# Altium PCB radxa_cm3_io_board_v1360_pcb_layout.PcbDoc (part 4 of 7)
Units mil, origin at the board's own origin, x right, y up, seen from the top; angles counter-clockwise.
Board outline 6299.61 x 3544.09 mil, 4 copper layers (Top, GND, Power, Bottom), stack 35.4 mil thick; 513 components, 397 nets, 1855 pads, 2695 vias.
Unrouted connection lines stored in the file: 280.
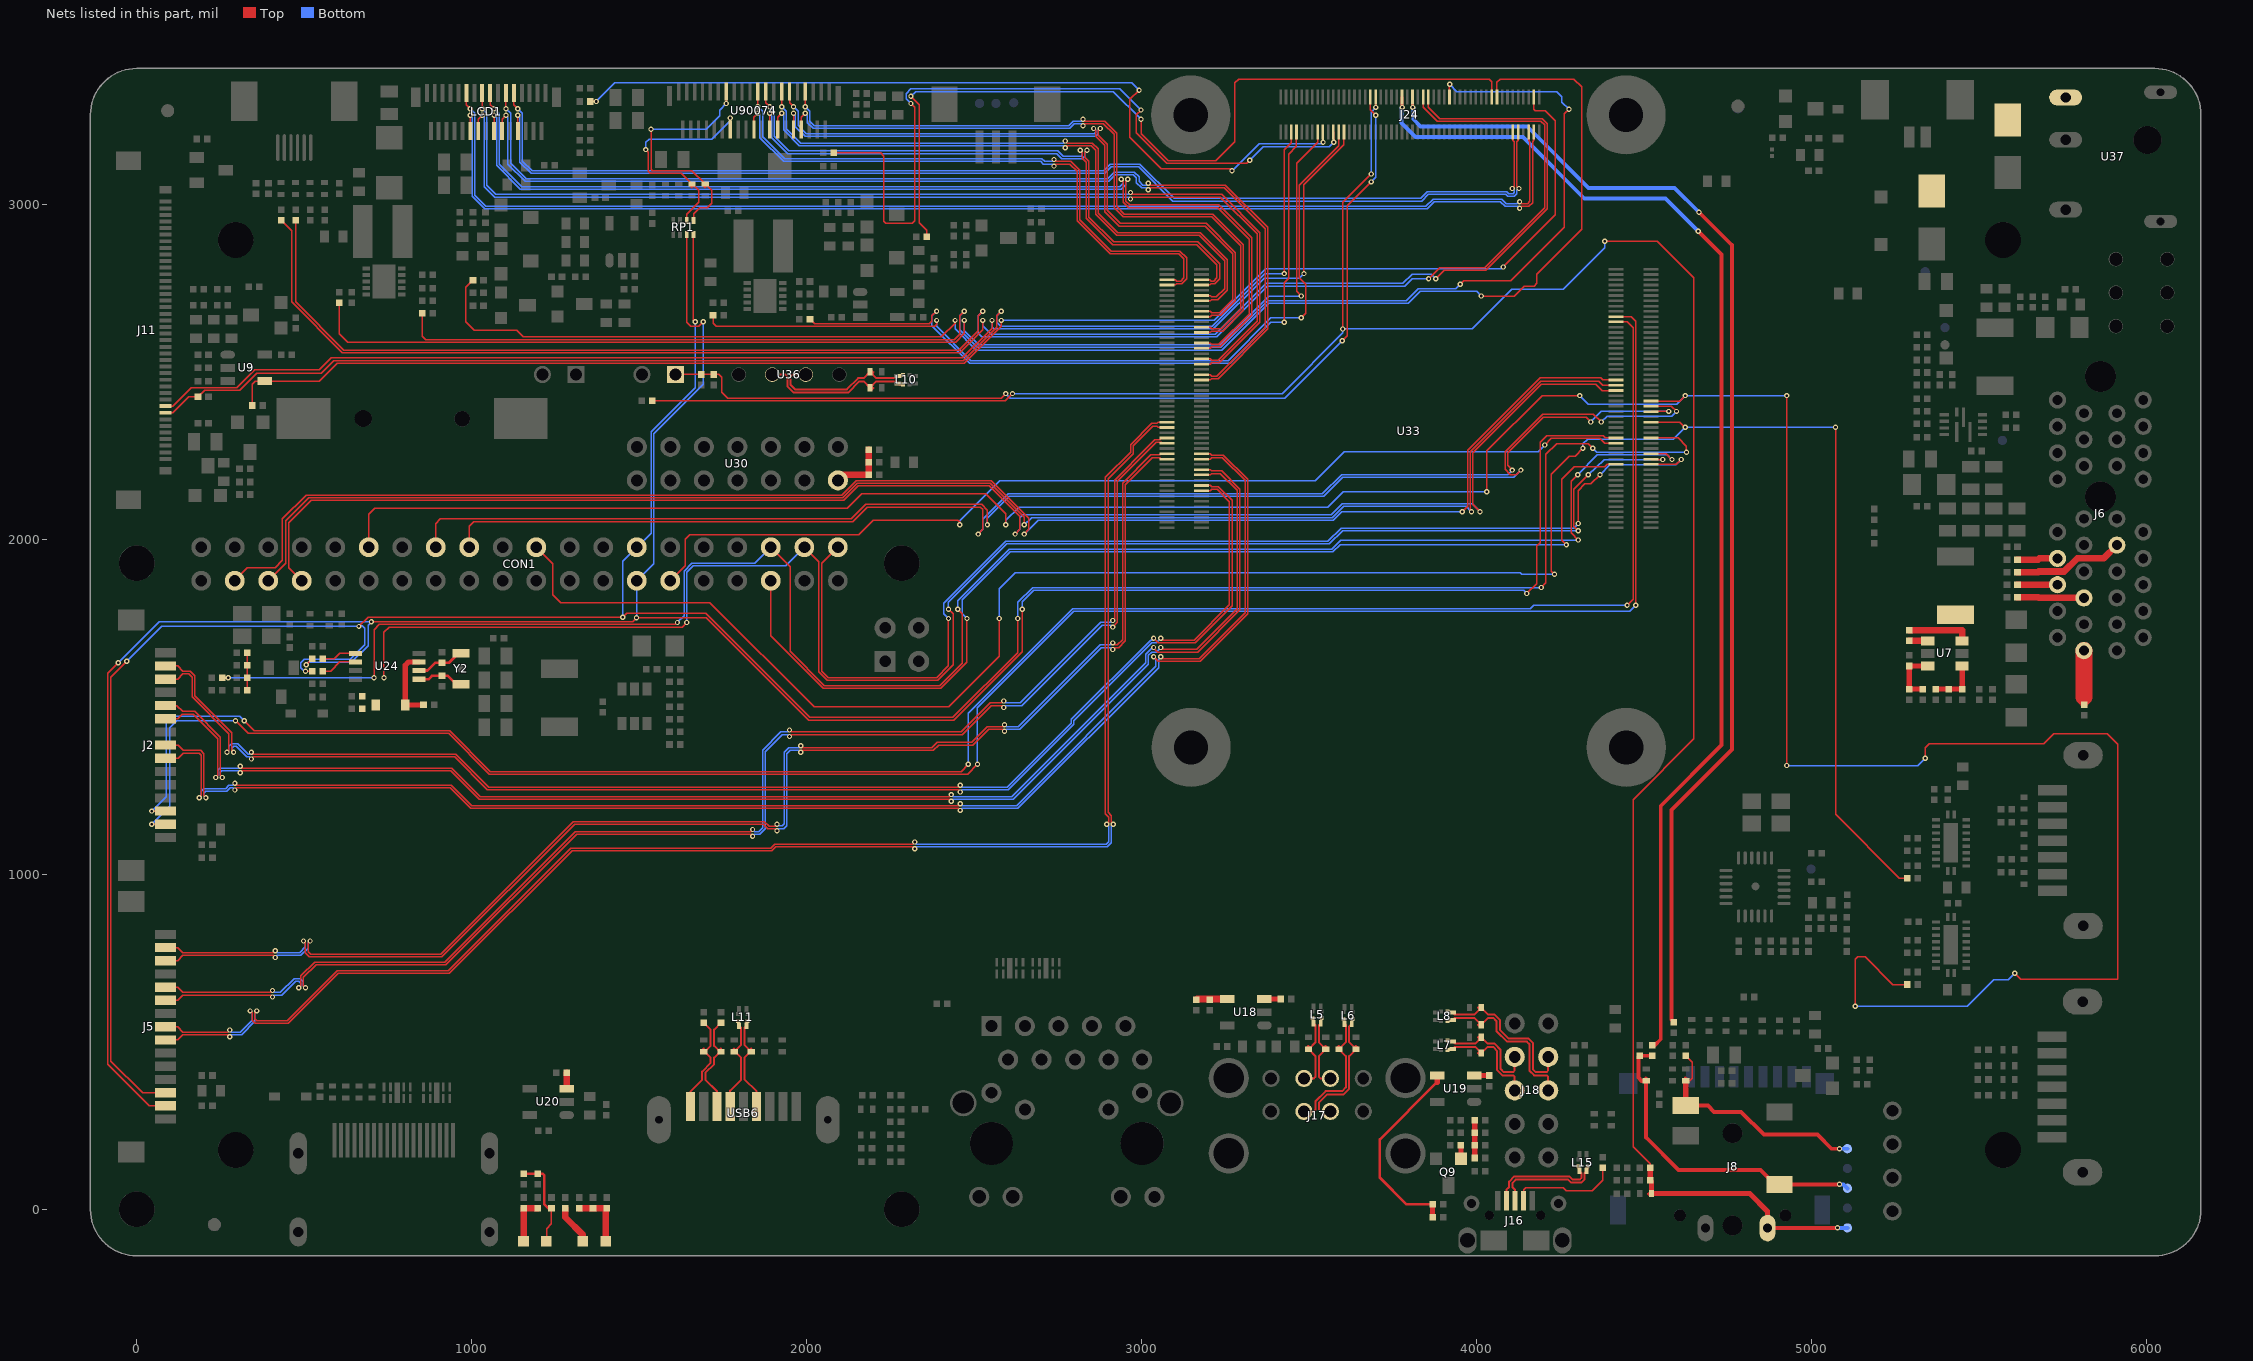
[diagram p6: the nets of this part, all layers, seen from the top]

## Via types
v1: diameter 15.75, hole 7.87, Top to Bottom, 2660 vias
v2: diameter 19.68, hole 11.81, Top to Bottom, 35 vias

## Nets (pads, with @x,y where several pads share a name; then routed paths per layer and width w, separated by ;. In a path a pad name is that pad's centre, name@x,y a point inside that pad or via, vN(x,y) a via of type N, cw(c..) or ccw(c..) an arc to the next point about the centre after c; other vN are vias at no path point) (continued)
HPL_OUT: J24.50 R16.2 | length 3570.7
  Top w7.87: J24.50@3808.46,3320.08 3808.46,3305.12 v1(3809.06,3289.37)
  Top w11.81: R16.2@4588.58,559.06 4580.71,566.93 4580.71,1191.73 4761.81,1372.83 4761.81,2877.95 v1(4663.39,2976.38)
  Bottom w11.81: v1(3809.06,3289.37) 3811.02,3287.4 3811.02,3253.94 3832.68,3232.28 4150.84,3232.28 4333.91,3049.21 4590.55,3049.21 v1(4663.39,2976.38)
HPR_OUT: J24.54 R19.2 | length 3646.2
  Top w7.87: J24.54@3776.97,3320.08 3776.97,3297.24 v1(3777.56,3289.37)
  Top w11.81: R19.2@4523.62,490.16 4531.5,490.16 4549.21,507.87 4549.21,1204.77 4730.31,1385.87 4730.31,2850.39 v1(4661.42,2919.29)
  Bottom w11.81: v1(3777.56,3289.37) 3775.59,3287.4 3775.59,3242.13 3816.93,3200.79 4137.8,3200.79 4320.87,3017.72 4562.99,3017.72 v1(4661.42,2919.29)
I2C0_SCL_PMIC: J2.3 U33.80 | length 5948.8
  Top w3.94: v1(45.28,1188.98) J2.3@86.58,1188.98 ; v1(320.87,1458.66) 350.39,1429.13 934.17,1429.13 1056.21,1307.09 2460.63,1307.09 v1(2482.28,1328.74) ; U33.80@4415.75,2649.02 4449.41,2649.02 4466.54,2631.89 4466.54,1820.87 v1(4448.82,1803.15)
  Bottom w3.94: v1(45.28,1188.98) 88.58,1232.28 88.58,1452.76 108.27,1472.44 307.09,1472.44 v1(320.87,1458.66) ; v1(2482.28,1328.74) 2482.28,1481.41 2794.18,1793.31 4160.33,1793.31 4170.18,1803.15 v1(4448.82,1803.15)
I2C0_SDA_PMIC: J2.2 U33.82 | length 6021.8
  Top w3.94: v1(45.28,1149.61) v1(45.28,1149.61) J2.2@86.61,1149.65 ; v1(295.28,1458.66) 332.68,1421.26 930.9,1421.26 1052.95,1299.21 2480.31,1299.21 v1(2509.84,1328.74) ; U33.82@4415.75,2664.76 4460.63,2664.76 4474.41,2650.98 v1(4474.41,1803.15)
  Bottom w3.94: v1(45.28,1149.61) 98.43,1202.76 98.43,1437.01 120.08,1458.66 v1(295.28,1458.66) ; v1(2509.84,1328.74) 2509.84,1497.83 2797.44,1785.43 4456.69,1785.43 v1(4474.41,1803.15)
I2C2_SCL_LCD: D14.1 RP1.4 U90074.27 | length 754.3
  Top w3.94: v1(1535.43,3224.41) 1535.43,3104.33 1539.37,3100.39 1657.48,3100.39 D14.1@1696.85,3061.02 1716.54,3041.34 1716.54,3003.94 1702.76,2990.16 1681.1,2990.16 1663.39,2972.44 1663.39,2953.1 RP1.4@1661.89,2951.6 ; v1(1759.84,3301.18) U90074.27@1759.84,3336.61
  Bottom w3.94: v1(1535.43,3224.41) 1700.79,3224.41 1740.16,3263.78 1740.16,3281.5 v1(1759.84,3301.18)
I2C2_SCL_M1: CON1.28 J5.3 R140.1 RP1.5 U33.35 | length 8631
  Top w3.94: v1(-29.53,1635.83) -76.77,1588.58 -76.77,442.91 17.75,348.4 J5.3@86.61,348.4 ; v1(503.94,1606.3) R140.1@523.62,1606.3 ; v1(663.39,1740.16) 690.94,1767.72 v1(1450.79,1767.72) 1462.6,1779.53 1698.14,1779.53 2009.17,1468.5 2436.39,1468.5 2629.92,1662.03 v1(2629.92,1763.78) ; RP1.5@1661.89,2910.6 1661.89,2653.54 1667.32,2648.11 v1(1667.32,2649.61) ; v1(4192.91,1856.3) 4206.69,1870.08 4206.69,2253.94 4238.19,2285.43 4332.68,2285.43 v1(4346.46,2271.65) ; U33.35@4520.47,2302.56 4600.98,2302.56 4625.98,2277.56 v1(4625.98,2259.84)
  Bottom w3.94: v1(-29.53,1635.83) 74.8,1740.16 v1@661.42,1740.16 ; v1(503.94,1606.3) 500,1606.3 490.16,1616.14 490.16,1631.89 500,1641.73 637.8,1641.73 681.1,1685.04 681.1,1734.25 673.23,1742.13 663.39,1742.13 v1@661.42,1740.16 ; v1(663.39,1740.16) v1@661.42,1740.16 ; v1(1450.79,1767.72) 1450.79,1934.25 CON1.28@1492.91,1976.38 1535.43,2018.9 1535.43,2320.87 1667.32,2452.76 v1(1667.32,2649.61) ; v1(2629.92,1763.78) 2629.92,1811.7 2674.52,1856.3 v1(4192.91,1856.3) ; v1(4346.46,2271.65) 4358.27,2259.84 v1(4625.98,2259.84)
I2C2_SCL_MO: CON1.5 U33.56 | length 4588.5
  Top w3.94: CON1.5@392.91,1876.38 444.88,1928.35 444.88,2055.12 513.78,2124.02 2107.59,2124.02 2150.9,2167.32 2547.92,2167.32 2649.61,2065.64 v1(2649.61,2043.31) ; v1(3984.25,2082.68) 3980.31,2086.61 3980.31,2261.81 4190.94,2472.44 4363.58,2472.44 4375.98,2460.04 U33.56@4415.75,2460.04
  Bottom w3.94: v1(2649.61,2043.31) 2671.26,2064.96 3568.96,2064.96 3602.42,2098.43 3968.5,2098.43 v1(3984.25,2082.68)
I2C2_SDA_LCD: D17.1 RP1.3 U90074.26 | length 688.7
  Top w3.94: v1(1519.69,3163.39) 1527.56,3155.51 1527.56,3098.43 1533.46,3092.52 1625.98,3092.52 D17.1@1657.48,3061.02 1677.17,3041.34 1677.17,3005.91 1641.89,2970.63 RP1.3@1641.89,2951.6 ; U90074.26@1771.65,3223.43 v1(1771.65,3257.87)
  Bottom w3.94: v1(1519.69,3163.39) 1519.69,3185.04 1529.53,3194.88 1716.54,3194.88 1771.65,3250 v1(1771.65,3257.87)
I2C2_SDA_M1: CON1.27 J5.2 R141.1 RP1.6 U33.36 | length 8380.9
  Top w3.94: v1@-55.12,1631.85 -86.57,1600.39 -86.57,433.03 37.36,309.1 J5.2@86.61,309.1 ; v1(505.91,1625.98) R141.1@523.62,1643.7 ; v1(700.79,1753.94) 1480.31,1753.94 v1(1492.13,1765.75) 1700.79,1765.75 2005.91,1460.63 2439.65,1460.63 2643.7,1664.68 v1(2643.7,1791.34) ; RP1.6@1641.89,2910.6 1641.89,2647.48 1653.54,2635.83 1677.17,2635.83 v1(1690.94,2649.61) ; v1(4149.61,1838.58) 4179.13,1868.11 4179.13,1980.31 4188.98,1990.16 4188.98,2289.37 4208.66,2309.06 4377.36,2309.06 4383.86,2302.56 U33.36@4415.75,2302.56
  Bottom w3.94: v1(-55.12,1631.89) 66.93,1753.94 v1@698.82,1753.94 ; v1(505.91,1625.98) 508.75,1628.83 508.75,1629.92 511.81,1632.98 640.86,1632.98 690.94,1683.07 690.94,1743.62 701.26,1753.94 v1@698.82,1753.94 ; v1(700.79,1753.94) v1@698.82,1753.94 ; v1(1492.13,1765.75) 1492.91,1766.54 CON1.27@1492.91,1876.38 1543.31,1926.77 1543.31,2314.96 1690.94,2462.6 v1(1690.94,2649.61) ; v1(2643.7,1791.34) 2643.7,1814.34 2677.78,1848.43 4139.76,1848.43 v1(4149.61,1838.58)
I2C2_SDA_MO: CON1.3 U33.58 | length 4727.1
  Top w3.94: CON1.3@292.91,1876.38 292.91,1877.56 330.71,1915.35 413.39,1915.35 435.04,1937.01 435.04,2061.02 505.91,2131.89 2104.33,2131.89 2133.86,2161.42 2147.64,2175.2 2551.18,2175.2 2663.39,2062.99 2663.39,2029.53 v1(2649.61,2015.75) ; v1(3956.69,2082.68) 3972.44,2098.43 3972.44,2265.75 4188.98,2482.28 4370.08,2482.28 4376.57,2475.79 U33.58@4415.75,2475.79
  Bottom w3.94: v1(2649.61,2015.75) 2690.94,2057.09 3572.22,2057.09 3597.81,2082.68 v1(3956.69,2082.68)
I2C3_SCL_TP: J24.44 R49.1 | length 4976.4
  Top w3.94: R49.1@431.1,2952.76 462.6,2921.26 462.6,2708.66 614.17,2557.09 2457.43,2557.09 2525.59,2625.25 v1(2525.59,2653.54) ; J24.44@3855.71,3320.08 3855.71,3289.96 3889.76,3255.91 4194.94,3255.91 4210.63,3240.22 4210.63,2990.83 4210.63,2986.9 4026.88,2803.15 3903.54,2803.15 v1(3877.95,2777.56)
  Bottom w3.94: v1(2525.59,2653.54) 2525.59,2637.8 2551.18,2612.2 3220.03,2612.2 3371.6,2763.78 3779.53,2763.78 3807.09,2791.34 3864.17,2791.34 v1(3877.95,2777.56)
I2C3_SDA_TP: J24.46 R48.1 | length 5017.6
  Top w3.94: R48.1@474.41,2952.76 474.41,2708.66 618.11,2564.96 2454.16,2564.96 2511.81,2622.61 2511.81,2667.32 v1(2525.59,2681.1) ; J24.46@3839.96,3320.08 3839.96,3289.96 3881.89,3248.03 4191.68,3248.03 4202.76,3236.95 4202.76,2990.16 4023.62,2811.02 3889.76,2811.02 v1(3856.3,2777.56)
  Bottom w3.94: v1(2525.59,2681.1) 2511.81,2667.32 2511.81,2615.29 2522.77,2604.33 3223.29,2604.33 3374.87,2755.91 3785.43,2755.91 3807.09,2777.56 v1(3856.3,2777.56)
I2S1_LRCK_RX_M1: CON1.36 R80.2 U33.29 | length 5592.8
  Top w3.94: R80.2@255.91,1586.61 v1(273.62,1586.61) ; v1(708.66,1586.61) 708.66,1730.31 724.41,1746.06 1608.27,1746.06 v1(1614.17,1751.97) ; CON1.36@1892.91,1976.38 1950.79,1918.5 1950.79,1665.35 2053.15,1562.99 2397.25,1562.99 2464.57,1630.31 2464.57,1777.56 v1(2450.79,1791.34) ; v1(4301.18,2192.91) 4281.5,2173.23 4281.5,2019.68 v1(4303.15,1998.03) ; U33.29@4520.47,2255.31 4565.55,2255.31 v1(4582.68,2238.19)
  Bottom w3.94: v1(273.62,1586.61) v1(708.66,1586.61) ; v1(1614.17,1751.97) 1633.86,1771.65 1633.86,1905.51 1657.48,1929.13 1845.67,1929.13 CON1.36@1892.91,1976.38 ; v1(2450.79,1791.34) 2450.79,1816.99 2604.27,1970.47 3566.93,1970.47 3594.49,1998.03 v1(4303.15,1998.03) ; v1(4301.18,2192.91) 4360.24,2251.97 4568.9,2251.97 v1(4582.68,2238.19)
I2S1_LRCK_TX_M1: CON1.35 U33.26 | length 3291.6
  Top w3.94: CON1.35@1892.91,1876.38 1892.91,1712.09 2049.89,1555.12 2400.51,1555.12 2478.35,1632.95 v1(2478.35,1763.78) ; v1(4267.72,1984.25) 4253.94,1998.03 4253.94,2179.13 4291.34,2216.54 4382.48,2216.54 4389.76,2223.82 U33.26@4415.75,2223.82
  Bottom w3.94: v1(2478.35,1763.78) 2464.57,1777.56 2464.57,1819.63 2607.53,1962.6 3570.87,1962.6 3592.52,1984.25 v1(4267.72,1984.25)
I2S1_MCLK_M1: CON1.22 R28.2 U33.41 | length 6350.2
  Top w3.94: CON1.22@1192.91,1976.38 1242.13,1927.17 1242.13,1834.65 1265.75,1811.02 1711.19,1811.02 2022.21,1500 2423.34,1500 2574.8,1651.46 v1(2574.8,1763.78) ; v1(4232.28,1895.67) 4222.44,1905.51 4222.44,2194.88 4275.59,2248.03 4293.31,2248.03 v1(4316.93,2271.65) ; U33.41@4520.47,2349.8 4606.3,2349.8 4621.46,2334.65 v1(4622.05,2334.65) ; v1(5070.87,2334.65) 5070.87,1179.13 5261.81,988.19 R28.2@5285.43,988.19
  Bottom w3.94: v1(2574.8,1763.78) 2574.8,1851.92 2622.49,1899.61 4129.92,1899.61 4133.86,1895.67 v1(4232.28,1895.67) ; v1(4316.93,2271.65) 4316.93,2285.43 4330.71,2299.21 4586.61,2299.21 v1(4622.05,2334.65) v1(5070.87,2334.65)
I2S1_SCLK_TX_M1: CON1.12 R135.2 U33.49 | length 8810.4
  Top w3.94: CON1.12@692.91,1976.38 692.91,2074.8 710.63,2092.52 2120.64,2092.52 2163.95,2135.83 2534.87,2135.83 2594.49,2076.21 v1(2594.49,2043.31) ; v1(4029.53,2141.73) 4029.53,2263.78 4194.88,2429.13 v1(4307.09,2429.13) ; U33.49@4520.47,2412.8 4605.71,2412.8 v1(4622.05,2429.13) ; v1(4925.2,1324.8) v1(4925.2,2429.13) ; v1(5129.92,606.3) 5129.92,746.06 5137.8,753.94 5159.45,753.94 5242.13,671.26 R135.2@5285.43,671.26 ; v1(5338.58,1346.46) 5338.58,1377.95 5350.39,1389.76 5692.91,1389.76 5722.44,1419.29 5881.89,1419.29 5913.39,1387.8 5913.39,687.01 5624.02,687.01 v1(5606.3,704.72)
  Bottom w3.94: v1(2594.49,2043.31) 2594.49,2056.47 2634.48,2096.46 3555.91,2096.46 3601.19,2141.73 v1(4029.53,2141.73) ; v1(4307.09,2429.13) 4332.68,2403.54 4596.46,2403.54 v1(4622.05,2429.13) v1(4925.2,2429.13) ; v1(4925.2,1324.8) 5316.93,1324.8 v1(5338.58,1346.46) ; v1(5129.92,606.3) 5464.57,606.3 5543.31,685.04 5586.61,685.04 v1(5606.3,704.72)
I2S1_SDI0_M1: CON1.38 U33.27 | length 5032
  Top w3.94: v1(738.19,1586.61) 738.19,1722.44 753.94,1738.19 1627.95,1738.19 v1(1641.73,1751.97) ; CON1.38@1992.91,1976.38 2035.43,1933.86 2035.43,1605.01 2061.7,1578.74 2390.73,1578.74 2437.01,1625.02 2437.01,1777.56 v1(2423.23,1791.34) ; v1(4303.15,2025.59) 4289.37,2039.37 4289.37,2149.61 v1(4332.68,2192.91) ; U33.27@4520.47,2239.57 4521.06,2238.19 v1(4555.12,2238.19)
  Bottom w3.94: v1(1641.73,1751.97) 1641.73,1901.57 1661.42,1921.26 1937.8,1921.26 CON1.38@1992.91,1976.38 ; v1(2423.23,1791.34) 2423.23,1811.7 2597.75,1986.22 3560.41,1986.22 3599.78,2025.59 v1(4303.15,2025.59) ; v1(4332.68,2192.91) 4379.92,2238.19 v1(4555.12,2238.19)
I2S1_SDI1_M1: CON1.18 U33.45 | length 4045.9
  Top w3.94: CON1.18@992.91,1976.38 992.91,2039.37 1006.69,2053.15 2136.95,2053.15 2180.25,2096.46 2518.57,2096.46 2525.59,2089.43 2525.59,2029.53 v1(2511.81,2015.75) ; v1(4106.3,2206.69) 4092.52,2220.47 4092.52,2257.87 4198.82,2364.17 4326.77,2364.17 v1(4340.55,2350.39) ; U33.45@4520.47,2381.3 4521.06,2381.89 v1(4572.83,2381.89)
  Bottom w3.94: v1(2511.81,2015.75) 2525.59,2029.53 2525.59,2060.46 2600.95,2135.83 3539.6,2135.83 3596.69,2192.91 4092.52,2192.91 v1(4106.3,2206.69) ; v1(4340.55,2350.39) 4372.05,2381.89 v1(4572.83,2381.89)
I2S1_SDI2_M1: CON1.16 U33.47 | length 4239.1
  Top w3.94: CON1.16@892.91,1976.38 892.91,2047.24 906.69,2061.02 2133.68,2061.02 2176.99,2104.33 2521.83,2104.33 2539.37,2086.79 v1(2539.37,2043.31) ; v1(4131.89,2206.69) 4118.11,2192.91 4100.39,2192.91 4084.65,2208.66 4084.65,2261.14 4197.53,2374.02 4348.43,2374.02 v1(4372.05,2350.39) ; U33.47@4520.47,2397.05 4581.3,2397.05 v1(4596.46,2381.89)
  Bottom w3.94: v1(2539.37,2043.31) 2539.37,2063.11 2604.21,2127.95 3542.86,2127.95 3599.95,2185.04 4110.24,2185.04 v1(4131.89,2206.69) ; v1(4372.05,2350.39) 4389.76,2368.11 4582.68,2368.11 v1(4596.46,2381.89)
I2S1_SDI3_M1: CON1.7 U33.54 | length 4671
  Top w3.94: CON1.7@492.91,1876.38 454.72,1914.57 454.72,2049.21 521.65,2116.14 2110.85,2116.14 2154.16,2159.45 2544.66,2159.45 2635.83,2068.28 2635.83,2029.53 v1(2622.05,2015.75) ; v1(4009.84,2082.68) 3988.19,2104.33 3988.19,2257.87 4192.91,2462.6 4355.71,2462.6 4374.02,2444.29 U33.54@4415.75,2444.29
  Bottom w3.94: v1(2622.05,2015.75) 2635.83,2029.53 2635.83,2064.4 2644.26,2072.83 3565.69,2072.83 3599.16,2106.3 3986.22,2106.3 v1(4009.84,2082.68)
I2S1_SDO0_M1: CON1.40 U33.25 | length 3515
  Top w3.94: CON1.40@2092.91,1976.38 2045.28,1928.74 2045.28,1606.3 2064.96,1586.61 2387.47,1586.61 2423.23,1622.38 v1(2423.23,1763.78) ; v1(4303.15,2047.24) 4303.15,2145.67 4322.83,2165.35 4340.55,2165.35 v1(4368.11,2192.91) ; U33.25@4520.47,2223.82 4595.87,2223.82 v1(4610.24,2238.19)
  Bottom w3.94: v1(2423.23,1763.78) 2409.45,1777.56 2409.45,1809.06 2594.49,1994.09 3555.85,1994.09 3595.22,2033.46 4289.37,2033.46 v1(4303.15,2047.24) ; v1(4368.11,2192.91) 4397.64,2222.44 4594.49,2222.44 v1(4610.24,2238.19)
I2S1_SDO2_M1: CON1.29 U33.34 | length 3074.2
  Top w3.94: CON1.29@1592.91,1876.38 1637.8,1921.26 1637.8,2000 1651.57,2013.78 2155.51,2013.78 2198.82,2057.09 2451.46,2057.09 2456.69,2051.86 v1(2456.69,2043.31) ; v1(4202.76,2281.5) 4222.44,2301.18 4367.52,2301.18 4381.89,2286.81 U33.34@4415.75,2286.81
  Bottom w3.94: v1(2456.69,2043.31) 2456.69,2055.12 2576.77,2175.2 3517.72,2175.2 3604.33,2261.81 4183.07,2261.81 v1(4202.76,2281.5)
LCD0_BL_EN: J11.32 J24.75 | length 4080.9
  Top w3.94: J11.32@86.61,2397.64 108.27,2397.64 163.39,2452.76 299.21,2452.76 352.36,2505.91 545.28,2505.91 580.71,2541.34 2463.95,2541.34 2553.15,2630.54 v1(2553.15,2653.54) ; v1(3484.25,2793.31) 3484.25,3059.06 3603.74,3178.54 J24.75@3603.74,3216.14
  Bottom w3.94: v1(2553.15,2653.54) 2553.15,2632.51 2557.7,2627.95 3213.51,2627.95 3365.08,2779.53 3470.47,2779.53 v1(3484.25,2793.31)
LCD0_BL_PWM5: J11.33 J24.95 R43.1 | length 4038.8
  Top w3.94: J11.33@86.61,2377.95 108.27,2377.95 155.51,2425.2 R43.1@183.07,2425.2 202.76,2444.88 307.09,2444.88 358.27,2496.06 551.18,2496.06 588.58,2533.46 2467.21,2533.46 2566.93,2633.18 2566.93,2667.32 v1(2580.71,2681.1) ; v1(3425.2,2793.31) 3425.2,3163.39 3446.26,3184.45 J24.95@3446.26,3216.14
  Bottom w3.94: v1(2580.71,2681.1) 2566.93,2667.32 2566.93,2647.64 2578.74,2635.83 3210.24,2635.83 3367.72,2793.31 v1(3425.2,2793.31)
LCD1_PWREN_H: J24.4 R41.1 U9.4 | length 4568.2
  Top w3.94: R41.1@344.49,2399.61 344.49,2462.6 354.33,2472.44 U9.4@381.89,2472.44 545.28,2472.44 598.43,2525.59 2470.47,2525.59 2580.71,2635.83 v1(2580.71,2653.54) ; v1(4078.74,2812.99) 4234.25,2968.5 4234.25,3250 4204.72,3279.53 4174.61,3279.53 4170.67,3283.46 J24.4@4170.67,3320.08
  Bottom w3.94: v1(2580.71,2653.54) 3216.83,2653.54 3370.37,2807.09 4072.83,2807.09 v1(4078.74,2812.99)
MCLK: C72.1 R86.1 R87.2 R88.1 | length 112.2
  Top w3.94: R86.1@330.71,1549.21 R88.1@330.71,1586.61 C72.1@330.71,1624.02 R87.2@330.71,1661.42
MIC1_IN: ED19.1 J8.5 J24.64 R32.2 R34.1 R35.2 TP4.1 | length 7590.4
  Top w3.94: R35.2@1539.37,2413.39 2592.52,2413.39 v1(2614.17,2435.04) ; v1(3600.39,2627.95) 3600.39,3005.91 v1(3685.04,3090.55) ; J24.64@3698.23,3320.08 3698.82,3319.49 v1(3698.82,3289.37) ; v1(4381.89,2889.76) 4538.08,2889.76 4647.64,2780.2 4647.64,1404.3 4466.54,1223.2 4466.54,187.01 4517.72,135.83 R34.1@4517.72,124.02
  Top w11.81: J8.5@4868.11,-55.91 4868.9,-55.12 v1(5076.77,-55.12)
  Top w15.75: R34.1@4517.72,124.02 R32.2@4517.72,86.61 4521.65,82.68 ED19.1@4521.65,47.24 4814.96,47.24 4868.11,-5.91 J8.5@4868.11,-55.91
  Bottom w3.94: v1(2614.17,2435.04) 3419.29,2435.04 3600.39,2616.14 v1(3600.39,2627.95) 3986.22,2627.95 4104.33,2746.06 4257.87,2746.06 4381.89,2870.08 v1(4381.89,2889.76) ; v1(3685.04,3090.55) 3685.04,3275.59 v1(3698.82,3289.37)
  Bottom w11.81: v1(5076.77,-55.12) TP4.1@5106.3,-55.12
MIC2_IN: C64.2 J10.1 J24.66 R73.2 | length 2908.6
  Top w3.94: J10.1@1608.27,2492.13 C64.2@1685.04,2492.13 1724.41,2492.13 R73.2@1722.44,2492.13 1738.19,2492.13 1746.06,2484.25 1746.06,2438.98 1763.78,2421.26 2580.71,2421.26 v1(2594.49,2435.04) ; v1(3598.43,2592.52) 3614.17,2608.27 3614.17,2996.06 v1(3685.04,3066.93) ; J24.66@3682.48,3320.08 3682.48,3281.5 3683.07,3281.5 v1(3698.82,3265.75)
  Bottom w3.94: v1(2594.49,2435.04) 2608.27,2421.26 3427.17,2421.26 v1(3598.43,2592.52) ; v1(3685.04,3066.93) 3698.82,3080.71 v1(3698.82,3265.75)
MIPI_BL_EN_1: J24.85 R54.1 | length 3654.4
  Top w3.94: R54.1@604.33,2706.69 604.33,2614.17 629.92,2588.58 2444.38,2588.58 2470.47,2614.67 v1(2470.47,2653.54) ; v1(3476.38,2726.38) 3462.6,2740.16 3462.6,3122.64 3525,3185.04 J24.85@3525,3216.14
  Bottom w3.94: v1(2470.47,2653.54) 2470.47,2623.22 2512.99,2580.71 3233.07,2580.71 3378.74,2726.38 v1(3476.38,2726.38)
MIPI_BL_EN_2: J24.77 R191.1 | length 2528.2
  Top w3.94: R191.1@1720.47,2669.29 1720.47,2645.67 1730.31,2635.83 2381.89,2635.83 2387.8,2641.73 v1(2387.8,2653.54) ; v1(3476.38,2661.42) 3490.16,2675.2 3490.16,2761.81 3470.47,2781.5 3470.47,3057.09 3587.99,3174.61 J24.77@3587.99,3216.14
  Bottom w3.94: v1(2387.8,2653.54) 2387.8,2635.83 2490.16,2533.46 3257.87,2533.46 3385.83,2661.42 v1(3476.38,2661.42)
MIPI_CSI_RX_CLK0N: J2.8 U33.127 | length 4241.2
  Top w3.94: J2.8@86.61,1385.83 124.02,1385.83 139.76,1370.08 190.94,1370.08 200.79,1360.24 200.79,1234.25 v1(206.69,1228.35) ; v1(293.31,1251.97) 299.21,1257.87 935.83,1257.87 996.85,1196.85 2452.76,1196.85 v1(2458.66,1190.94) ; v1(3057.09,1649.61) 3062.99,1643.7 3171.94,1643.7 3309.06,1780.82 3309.06,2175.84 3240.83,2243.5 3208.66,2243.5 3204.72,2239.57 U33.127@3179.13,2239.57
  Bottom w3.94: v1(206.69,1228.35) 200.79,1234.25 200.79,1242.13 206.69,1248.03 269.69,1248.03 279.53,1257.87 287.4,1257.87 v1(293.31,1251.97) ; v1(2458.66,1190.94) 2464.57,1196.85 2629.58,1196.85 3050.2,1617.46 3050.2,1642.72 v1(3057.09,1649.61)
MIPI_CSI_RX_CLK0P: J2.7 U33.129 | length 4280.3
  Top w3.94: J2.7@86.61,1346.46 124.02,1346.46 139.76,1362.2 187.01,1362.2 192.91,1356.3 192.91,1234.25 v1(187.01,1228.35) ; v1(293.31,1271.65) 299.21,1265.75 939.09,1265.75 1000.11,1204.72 2452.76,1204.72 v1(2458.66,1210.63) ; v1(3035.43,1649.61) 3049.21,1635.83 3175.2,1635.83 3316.93,1777.56 3316.93,2179.13 3244.09,2251.38 3208.66,2251.38 3204.72,2255.31 U33.129@3179.13,2255.31
  Bottom w3.94: v1(187.01,1228.35) 192.91,1234.25 192.91,1248.03 200.79,1255.91 265.75,1255.91 275.59,1265.75 287.4,1265.75 v1(293.31,1271.65) ; v1(2458.66,1210.63) 2464.57,1204.72 2626.32,1204.72 3042.32,1620.73 3042.32,1642.72 v1(3035.43,1649.61)
MIPI_CSI_RX_CLK1N: J5.8 U33.140 | length 4492.8
  Top w3.94: J5.8@86.61,545.28 122.05,545.28 137.8,529.53 271.65,529.53 v1(277.56,535.43) ; v1(338.58,592.52) 344.49,586.61 344.49,564.96 354.33,555.12 452.76,555.12 602.36,704.72 933.54,704.72 1299.68,1070.87 1895.61,1070.87 1907.42,1082.68 2316.93,1082.68 v1(2322.83,1076.77) ; v1(2915.35,1149.61) 2909.45,1155.51 2909.45,1175.2 2899.61,1185.04 2899.61,2181.1 2974.41,2255.91 2974.41,2279.27 3033.13,2337.99 3045.28,2337.99 3049.21,2334.06 U33.140@3075.2,2334.06
  Bottom w3.94: v1(277.56,535.43) 283.46,529.53 309.06,529.53 344.49,564.96 344.49,586.61 v1(338.58,592.52) ; v1(2322.83,1076.77) 2328.74,1082.68 2897.64,1082.68 2909.45,1094.49 2909.45,1143.7 v1(2915.35,1149.61)
MIPI_CSI_RX_CLK1P: J5.7 U33.142 | length 4492.8
  Top w3.94: J5.7@86.61,505.91 122.05,505.91 137.8,521.65 271.65,521.65 v1(277.56,515.75) ; v1(358.27,592.52) 352.36,586.61 352.36,568.9 358.27,562.99 448.82,562.99 598.43,712.6 930.28,712.6 1296.42,1078.74 1892.35,1078.74 1904.16,1090.55 2316.93,1090.55 v1(2322.83,1096.46) ; v1(2895.67,1149.61) 2901.58,1155.51 2901.58,1171.26 2891.73,1181.1 2891.73,2185.04 2966.54,2259.84 2966.54,2282.54 3029.87,2345.87 3045.28,2345.87 3049.21,2349.8 U33.142@3075.2,2349.8
  Bottom w3.94: v1(277.56,515.75) 283.46,521.65 312.99,521.65 352.36,561.02 352.36,586.61 v1(358.27,592.52) ; v1(2322.83,1096.46) 2328.74,1090.55 2894.38,1090.55 2901.57,1097.75 2901.57,1143.7 v1(2895.67,1149.61)
MIPI_CSI_RX_D0N: J2.14 U33.115 | length 4081.9
  Top w3.94: J2.14@86.61,1622.05 122.05,1622.05 137.8,1606.3 159.45,1606.3 173.23,1592.52 173.23,1533.46 283.46,1423.23 283.46,1370.08 v1(289.37,1364.17) ; v1(342.52,1344.49) 348.43,1350.39 948.82,1350.39 1047.24,1251.97 2452.76,1251.97 v1(2458.66,1246.06) ; v1(3057.09,1704.72) 3062.99,1698.82 3156.19,1698.82 3261.81,1804.44 3261.81,2112.81 3225.09,2149.02 3208.66,2149.02 3204.72,2145.08 U33.115@3179.13,2145.08
  Bottom w3.94: v1(289.37,1364.17) 283.46,1370.08 283.46,1375.98 289.37,1381.89 297.24,1381.89 328.74,1350.39 336.61,1350.39 v1(342.52,1344.49) ; v1(2458.66,1246.06) 2464.57,1251.97 2602.11,1251.97 2797.86,1447.72 2797.86,1459.08 3029.73,1690.94 3043.31,1690.94 v1(3057.09,1704.72)
MIPI_CSI_RX_D0P: J2.13 U33.117 | length 4109.1
  Top w3.94: J2.13@86.61,1582.68 122.05,1582.68 137.8,1598.43 155.51,1598.43 165.35,1588.58 165.35,1529.53 275.59,1419.29 275.59,1370.08 v1(269.69,1364.17) ; v1(342.52,1364.17) 348.43,1358.27 952.76,1358.27 1051.18,1259.84 2452.76,1259.84 v1(2458.66,1265.75) ; v1(3035.43,1704.72) 3049.21,1690.94 3159.45,1690.94 3269.69,1801.18 3269.69,2116.14 3228.35,2156.89 3208.66,2156.89 3204.72,2160.83 U33.117@3179.13,2160.83
  Bottom w3.94: v1(269.69,1364.17) 275.59,1370.08 275.59,1381.89 283.46,1389.76 301.18,1389.76 332.68,1358.27 336.61,1358.27 v1(342.52,1364.17) ; v1(2458.66,1265.75) 2464.57,1259.84 2598.84,1259.84 2789.99,1450.99 2789.99,1462.34 3026.46,1698.82 3029.53,1698.82 v1(3035.43,1704.72)
MIPI_CSI_RX_D1N: J2.11 U33.121 | length 4162.3
  Top w3.94: J2.11@86.61,1503.94 120.08,1503.94 137.8,1486.22 173.23,1486.22 250,1409.45 250,1295.28 v1(255.91,1289.37) ; v1(309.06,1303.15) 314.96,1309.06 937.8,1309.06 1022.44,1224.41 2425.2,1224.41 v1(2431.1,1218.5) ; v1(3057.09,1677.17) 3062.99,1671.26 3164.06,1671.26 3285.43,1792.63 3285.43,2146.1 3234.69,2196.26 3208.66,2196.26 3204.72,2192.32 U33.121@3179.13,2192.32
  Bottom w3.94: v1(255.91,1289.37) 250,1295.28 250,1305.12 253.94,1309.06 303.15,1309.06 v1(309.06,1303.15) ; v1(2431.1,1218.5) 2437.01,1224.41 2616.14,1224.41 3019.69,1627.95 3019.69,1653.35 3029.73,1663.39 3043.31,1663.39 v1(3057.09,1677.17)
MIPI_CSI_RX_D1P: J2.10 U33.123 | length 4189.9
  Top w3.94: J2.10@86.61,1464.57 122.05,1464.57 135.83,1478.35 169.29,1478.35 242.13,1405.51 242.13,1295.28 v1(236.22,1289.37) ; v1(309.06,1322.83) 314.96,1316.93 941.06,1316.93 1025.7,1232.28 2425.2,1232.28 v1(2431.1,1238.19) ; v1(3035.43,1677.17) 3035.43,1675.2 3047.24,1663.39 3167.32,1663.39 3293.31,1789.37 3293.31,2150.04 3238.58,2204.13 3208.66,2204.13 3204.72,2208.07 U33.123@3179.13,2208.07
  Bottom w3.94: v1(236.22,1289.37) 242.13,1295.28 242.13,1311.02 248.03,1316.93 303.15,1316.93 v1(309.06,1322.83) ; v1(2431.1,1238.19) 2437.01,1232.28 2612.2,1232.28 3011.81,1631.89 3011.81,1656.61 3026.46,1671.26 3027.42,1671.26 3034.38,1678.22 v1(3035.43,1677.17)
MIPI_CSI_RX_D2N: J5.14 U33.128 | length 4119.2
  Top w3.94: J5.14@86.61,781.5 122.05,781.5 137.8,765.75 407.48,765.75 v1(413.39,771.65) ; v1(498.03,801.18) 503.94,795.28 503.94,765.75 515.75,753.94 911.42,753.94 1307.09,1149.61 1870.08,1149.61 1883.86,1135.83 1905.51,1135.83 v1(1911.42,1129.92) ; v1(1982.28,1364.17) 1988.19,1370.08 2377.95,1370.08 2393.7,1385.83 2496.26,1385.83 2543.5,1433.07 2584.65,1433.07 v1(2590.55,1427.17) ; v1(2913.39,1671.26) 2919.29,1677.17 2931.1,1677.17 2950.79,1696.85 2950.79,2163.39 3031.3,2243.9 3053.15,2243.9 3057.48,2239.57 U33.128@3075.2,2239.57
  Bottom w3.94: v1(413.39,771.65) 419.29,765.75 486.22,765.75 503.94,783.46 503.94,795.28 v1(498.03,801.18) ; v1(1911.42,1129.92) 1917.32,1135.83 1931.1,1135.83 1940.94,1145.67 1940.94,1360.24 1950.79,1370.08 1976.38,1370.08 v1(1982.28,1364.17) ; v1(2590.55,1427.17) 2596.46,1433.07 2635.83,1433.07 2879.92,1677.17 2907.48,1677.17 v1(2913.39,1671.26)
MIPI_CSI_RX_D2P: J5.13 U33.130 | length 4116.1
  Top w3.94: J5.13@86.61,742.13 122.05,742.13 137.8,757.87 407.48,757.87 v1(413.39,751.97) ; v1(517.72,801.18) 511.81,795.28 511.81,769.68 519.69,761.81 907.48,761.81 1303.15,1157.48 1874.02,1157.48 1887.8,1143.7 1905.51,1143.7 v1(1911.42,1149.61) ; v1(1982.28,1383.86) 1988.19,1377.95 2374.02,1377.95 2389.76,1393.7 2492.13,1393.7 2539.37,1440.94 2584.65,1440.94 v1(2590.55,1446.85) ; v1(2913.39,1690.94) 2919.29,1685.04 2927.17,1685.04 2942.91,1700.79 2942.91,2167.32 3027.56,2251.97 3053.15,2251.97 3056.5,2255.31 U33.130@3075.2,2255.31
  Bottom w3.94: v1(413.39,751.97) 419.29,757.87 490.16,757.87 511.81,779.53 511.81,795.28 v1(517.72,801.18) ; v1(1911.42,1149.61) 1915.35,1145.67 1927.17,1145.67 1933.07,1151.57 1933.07,1364.17 1946.85,1377.95 1976.38,1377.95 v1(1982.28,1383.86) ; v1(2590.55,1446.85) 2596.46,1440.94 2631.89,1440.94 2875.98,1685.04 2907.48,1685.04 v1(2913.39,1690.94)
MIPI_CSI_RX_D3N: J5.11 U33.134 | length 4138.9
  Top w3.94: J5.11@86.61,663.39 122.05,663.39 137.8,647.64 399.61,647.64 v1(405.51,653.54) ; v1(503.94,661.42) 498.03,667.32 498.03,692.91 535.43,730.31 923.23,730.31 1312.99,1120.08 1832.68,1120.08 v1(1838.58,1114.17) ; v1(1948.82,1411.42) 1954.72,1417.32 2464.57,1417.32 2551.18,1503.94 2582.68,1503.94 v1(2588.58,1498.03) ; v1(2913.39,1738.19) 2927.17,1751.97 2927.17,2173.23 3043.31,2289.37 3059.11,2289.37 3061.67,2286.81 U33.134@3075.2,2286.81
  Bottom w3.94: v1(405.51,653.54) 411.42,647.64 429.13,647.64 470.47,688.98 488.19,688.98 498.03,679.13 498.03,667.32 v1(503.94,661.42) ; v1(1838.58,1114.17) 1844.49,1120.08 1860.24,1120.08 1875.98,1135.83 1875.98,1366.14 1927.17,1417.32 1942.91,1417.32 v1(1948.82,1411.42) ; v1(2588.58,1498.03) 2594.49,1503.94 2641.73,1503.94 2881.89,1744.09 2907.48,1744.09 v1(2913.39,1738.19)
MIPI_CSI_RX_D3P: J5.10 U33.136 | length 4130.6
  Top w3.94: J5.10@86.61,624.02 122.05,624.02 137.8,639.76 399.61,639.76 v1(405.51,633.86) ; v1(484.25,661.42) 490.16,667.32 490.16,696.85 531.5,738.19 919.29,738.19 1309.06,1127.95 1832.68,1127.95 v1(1838.58,1133.86) ; v1(1948.82,1431.1) 1954.72,1425.2 2460.63,1425.2 2547.24,1511.81 2582.68,1511.81 v1(2588.58,1517.72) ; v1(2913.39,1757.87) 2919.29,1763.78 2919.29,2177.17 3019.69,2277.56 3039.37,2297.55 3053.15,2297.55 3058.16,2302.56 U33.136@3075.2,2302.56
  Bottom w3.94: v1(405.51,633.86) 411.42,639.76 433.07,639.76 474.41,681.1 484.25,681.1 490.16,675.2 490.16,667.32 v1(484.25,661.42) ; v1(1838.58,1133.86) 1844.49,1127.95 1856.3,1127.95 1868.11,1139.76 1868.11,1370.08 1923.23,1425.2 1942.91,1425.2 v1(1948.82,1431.1) ; v1(2588.58,1517.72) 2594.49,1511.81 2637.8,1511.81 2877.95,1751.97 2907.48,1751.97 v1(2913.39,1757.87)
MIPI_DSI_TX0_CLKN/LVDS_TX0_CLKN: LCD1.18 U33.169 | length 3040.7
  Top w3.94: LCD1.18@1066.93,3219.5 v1(1066.93,3265.75) ; v1(2958.66,3074.8) 2952.76,3068.9 2952.76,3009.17 2963.89,2998.03 3230.31,2998.03 3328.74,2899.61 3328.74,2669.29 3233.66,2574.21 3208.66,2574.21 3204.72,2570.28 U33.169@3179.13,2570.28
  Bottom w3.94: v1(1066.93,3265.75) 1074.8,3257.87 1074.8,3116.14 1145.67,3045.28 2938.98,3045.28 2952.76,3059.06 2952.76,3068.9 v1(2958.66,3074.8)
MIPI_DSI_TX0_CLKP/LVDS_TX0_CLKP: LCD1.17 U33.171 | length 3030
  Top w3.94: LCD1.17@1055.12,3332.68 1055.12,3297.24 v1(1066.93,3285.43) ; v1(2938.98,3074.8) 2944.88,3068.9 2944.88,3005.91 2960.63,2990.16 3227.05,2990.16 3320.87,2896.34 3320.87,2672.55 3230.4,2582.09 3208.66,2582.09 3204.72,2586.02 U33.171@3179.13,2586.02
  Bottom w3.94: v1(1066.93,3285.43) 1082.68,3269.68 1082.68,3119.4 1148.93,3053.15 2935.04,3053.15 2944.88,3062.99 2944.88,3068.9 v1(2938.98,3074.8)
MIPI_DSI_TX0_D0N/LVDS_TX0_D0N: LCD1.21 U33.157 | length 3147.2
  Top w3.94: v1(1102.36,3285.43) LCD1.21@1102.36,3332.68 ; v1(3019.69,3062.99) 3025.59,3057.09 3250,3057.09 3375.98,2931.1 3375.98,2627.95 3227.76,2479.72 3208.66,2479.72 3204.72,2475.79 U33.157@3179.13,2475.79
  Bottom w3.94: v1(1102.36,3285.43) 1116.14,3271.65 1116.14,3123.34 1162.71,3076.77 2898.31,3076.77 2918,3096.46 2978.35,3096.46 2992.13,3082.68 2992.13,3068.22 3003.26,3057.09 3013.78,3057.09 v1(3019.69,3062.99)
MIPI_DSI_TX0_D0P/LVDS_TX0_D0P: LCD1.20 U33.159 | length 3115.1
  Top w3.94: LCD1.20@1090.55,3219.5 1090.55,3253.94 v1(1102.36,3265.75) ; v1(3019.69,3043.31) 3025.59,3049.21 3246.74,3049.21 3368.11,2927.84 3368.11,2631.21 3224.49,2487.6 3208.66,2487.6 3204.72,2491.54 U33.159@3179.13,2491.54
  Bottom w3.94: v1(1102.36,3265.75) 1108.27,3259.84 1108.27,3120.08 1159.45,3068.9 2901.57,3068.9 2921.26,3088.58 2975.09,3088.58 2984.25,3079.42 2984.25,3064.96 3000,3049.21 3013.78,3049.21 v1(3019.69,3043.31)
MIPI_DSI_TX0_D1N/LVDS_TX0_D1N: LCD1.15 U33.163 | length 3144.9
  Top w3.94: v1(1031.5,3285.43) LCD1.15@1031.49,3332.68 ; v1(2966.54,3035.43) 2972.44,3029.53 3238.19,3029.53 3352.36,2915.35 3352.36,2647.64 3231.69,2526.97 3208.66,2526.97 3204.72,2523.03 U33.163@3179.13,2523.03
  Bottom w3.94: v1(1031.5,3285.43) 1045.28,3271.65 1045.28,3056.41 1072.16,3029.53 2960.63,3029.53 v1(2966.54,3035.43)
MIPI_DSI_TX0_D1P/LVDS_TX0_D1P: LCD1.14 U33.165 | length 3112.8
  Top w3.94: LCD1.14@1019.68,3219.5 1019.68,3253.94 v1(1031.5,3265.75) ; v1(2966.54,3015.75) 2972.44,3021.65 3234.93,3021.65 3344.49,2912.09 3344.49,2650.9 3228.43,2534.84 3208.66,2534.84 3204.72,2538.78 U33.165@3179.13,2538.78
  Bottom w3.94: v1(1031.5,3265.75) 1037.4,3259.84 1037.4,3053.15 1068.9,3021.65 2960.63,3021.65 v1(2966.54,3015.75)
MIPI_DSI_TX0_D2N/LVDS_TX0_D2N: J24.3 LCD1.12 | length 3707.8
  Top w3.94: LCD1.12@996.06,3219.5 v1(996.06,3265.75) ; v1(4127.95,2988.19) 4133.86,2994.09 4155.51,2994.09 4166.73,3005.31 4166.73,3187.01 4170.67,3190.94 J24.3@4170.67,3216.14
  Bottom w3.94: v1(996.06,3265.75) 1001.97,3259.84 1001.97,3023.62 1039.37,2986.22 3832.68,2986.22 3851.69,2986.22 3873.34,3007.87 4070.87,3007.87 4084.65,2994.09 4122.05,2994.09 v1(4127.95,2988.19)
MIPI_DSI_TX0_D2P/LVDS_TX0_D2P: J24.5 LCD1.11 | length 3712.9
  Top w3.94: LCD1.11@984.25,3332.68 984.25,3297.24 v1(996.06,3285.43) ; v1(4127.95,3007.87) 4133.86,3001.97 4151.57,3001.97 4158.86,3009.25 4158.86,3187.01 4154.92,3190.94 J24.5@4154.92,3216.14
  Bottom w3.94: v1(996.06,3285.43) 1009.84,3271.65 1009.84,3026.88 1042.63,2994.09 3848.43,2994.09 3870.08,3015.75 4041.34,3015.75 4074.13,3015.75 4087.91,3001.97 4120.08,3001.97 4127.95,3009.84 v1(4127.95,3007.87)
MIPI_DSI_TX0_D3N/LVDS_TX0_D3N: J24.9 LCD1.24 | length 3434.9
  Top w3.94: LCD1.24@1137.79,3219.5 v1(1137.8,3265.75) ; J24.9@4123.43,3216.14 4123.43,3190.94 4119.49,3187.01 4119.49,3053.15 4120.08,3053.15 v1(4125.98,3047.24)
  Bottom w3.94: v1(1137.8,3265.75) 1143.7,3259.84 1143.7,3125.98 1177.17,3092.52 2889.76,3092.52 2909.45,3112.2 2990.83,3112.2 3093.2,3009.84 3791.34,3009.84 3835.94,3009.84 3855.62,3029.53 4086.61,3029.53 4092.52,3023.62 4112.2,3023.62 4120.08,3031.5 4120.08,3041.34 v1(4125.98,3047.24)
MIPI_DSI_TX0_D3P/LVDS_TX0_D3P: J24.11 LCD1.23 | length 3436.4
  Top w3.94: LCD1.23@1125.98,3332.68 1125.98,3297.24 v1(1137.8,3285.43) ; v1(4106.3,3047.24) 4106.3,3047.83 4111.61,3053.15 4111.61,3187.01 4107.68,3190.94 J24.11@4107.68,3216.14
  Bottom w3.94: v1(1137.8,3285.43) 1151.57,3271.65 1151.57,3129.25 1180.43,3100.39 2886.5,3100.39 2906.19,3120.08 2994.09,3120.08 3096.46,3017.72 3832.68,3017.72 3852.36,3037.4 4082.68,3037.4 4089.88,3037.4 4095.78,3031.5 4108.27,3031.5 4112.2,3035.43 4112.2,3041.34 v1(4106.3,3047.24)
MIPI_DSI_TX1_CLKN: U33.187 U90074.13 | length 1892.7
  Top w3.94: v1(1925.2,3291.34) U90074.13@1925.2,3336.61 ; v1(2771.65,3188.98) 2777.56,3183.07 2852.36,3183.07 2870.08,3165.35 2870.08,2973.73 2928.46,2915.35 3174.86,2915.35 3255.91,2834.31 3255.91,2744.09 3226.38,2715.94 3208.66,2715.94 3204.72,2712.01 U33.187@3179.13,2712.01
  Bottom w3.94: v1(1925.2,3291.34) 1938.98,3277.56 1938.98,3225.7 1981.61,3183.07 2765.75,3183.07 v1(2771.65,3188.98)
MIPI_DSI_TX1_CLKP: U33.189 U90074.14 | length 1864.5
  Top w3.94: U90074.14@1913.39,3223.43 1913.39,3259.84 v1(1925.2,3271.65) ; v1(2771.65,3169.29) 2777.56,3175.2 2849.1,3175.2 2862.2,3162.09 2862.2,2970.47 2925.2,2907.48 3171.6,2907.48 3248.03,2831.05 3248.03,2747.57 3223.12,2723.82 3208.66,2723.82 3204.72,2727.76 U33.189@3179.13,2727.76
  Bottom w3.94: v1(1925.2,3271.65) 1931.1,3265.75 1931.1,3222.44 1978.35,3175.2 2765.75,3175.2 v1(2771.65,3169.29)
MIPI_DSI_TX1_D0N: U33.175 U90074.7 | length 2032.6
  Top w3.94: v1(1996.06,3291.34) U90074.7@1996.06,3336.61 ; v1(2824.8,3253.94) 2830.71,3248.03 2889.76,3248.03 2925.2,3212.6 2925.2,2993.76 2948.48,2970.47 3212.26,2970.47 3303.15,2879.58 3303.15,2876.32 3303.15,2683.41 3241.2,2621.46 3208.66,2621.46 3204.72,2617.52 U33.175@3179.13,2617.52
  Bottom w3.94: v1(1996.06,3291.34) 2009.84,3277.56 2009.84,3247.36 2022.95,3234.25 2781.5,3234.25 2795.28,3248.03 2818.9,3248.03 v1(2824.8,3253.94)
MIPI_DSI_TX1_D0P: U33.177 U90074.8 | length 2004
  Top w3.94: U90074.8@1984.25,3223.43 1984.25,3259.84 v1(1996.06,3271.65) ; v1(2824.8,3234.25) 2830.71,3240.16 2885.83,3240.16 2917.32,3208.66 2917.32,2990.5 2945.22,2962.6 3209,2962.6 3295.28,2876.32 3295.28,2686.67 3237.94,2629.33 3208.66,2629.33 3204.72,2633.27 U33.177@3179.13,2633.27
  Bottom w3.94: v1(1996.06,3271.65) 2001.97,3265.75 2001.97,3244.09 2019.69,3226.38 2649.61,3226.38 2784.76,3226.38 2798.54,3240.16 2818.9,3240.16 v1(2824.8,3234.25)
MIPI_DSI_TX1_D1N: U33.181 U90074.10 | length 1983.6
  Top w3.94: U90074.10@1960.63,3223.43 v1(1960.63,3271.65) ; v1(2875.98,3226.38) 2870.08,3220.47 2870.08,3206.69 2897.64,3179.13 2897.64,2981.61 2936.33,2942.91 3192.58,2942.91 3279.53,2855.96 3279.53,2712.6 3236.22,2668.7 3208.66,2668.7 3204.72,2664.76 U33.181@3179.13,2664.76
  Bottom w3.94: v1(1960.63,3271.65) 1966.54,3265.75 1966.54,3232.28 1996.06,3202.76 2862.2,3202.76 2870.08,3210.63 2870.08,3220.47 v1(2875.98,3226.38)
MIPI_DSI_TX1_D1P: U33.183 U90074.11 | length 1968.9
  Top w3.94: U90074.11@1948.82,3336.61 1948.82,3303.15 v1(1960.63,3291.34) ; v1(2856.3,3226.38) 2862.2,3220.47 2862.2,3208.66 2862.2,3203.43 2889.76,3175.87 2889.76,2978.35 2933.07,2935.04 3189.31,2935.04 3271.65,2852.7 3271.65,2715.86 3232.9,2676.57 3208.66,2676.57 3204.72,2680.51 U33.183@3179.13,2680.51
  Bottom w3.94: v1(1960.63,3291.34) 1974.41,3277.56 1974.41,3235.54 1999.32,3210.63 2858.27,3210.63 2862.2,3214.57 2862.2,3220.47 v1(2856.3,3226.38)
MIPI_DSI_TX1_D2N: U33.193 U90074.16 | length 1868.2
  Top w3.94: U90074.16@1889.76,3223.43 v1(1889.76,3271.65) ; v1(2836.61,3161.42) 2830.71,3155.51 2830.71,3141.06 2842.52,3129.25 2842.52,2961.92 2916.65,2887.8 3166.99,2887.8 3232.28,2822.5 3232.28,2777.34 3218.13,2763.19 3207.48,2763.19 3203.54,2759.25 U33.193@3179.13,2759.25
  Bottom w3.94: v1(1889.76,3271.65) 1895.67,3265.75 1895.67,3198.82 1942.91,3151.57 2746.06,3151.57 2761.81,3135.83 2822.83,3135.83 2830.71,3143.7 2830.71,3155.51 v1(2836.61,3161.42)
MIPI_DSI_TX1_D2P: U33.195 U90074.17 | length 1853.2
  Top w3.94: U90074.17@1877.95,3336.61 1877.95,3303.15 v1(1889.76,3291.34) ; v1(2816.93,3161.42) 2822.83,3155.51 2822.83,3137.8 2834.65,3125.98 2834.65,2958.66 2913.39,2879.92 3163.72,2879.92 3224.41,2819.24 3224.41,2780.6 3214.87,2771.06 3207.48,2771.06 3203.54,2775 U33.195@3179.13,2775
  Bottom w3.94: v1(1889.76,3291.34) 1903.54,3277.56 1903.54,3202.76 1946.85,3159.45 2746.06,3159.45 2749.32,3159.45 2765.07,3143.7 2818.9,3143.7 2822.83,3147.64 2822.83,3155.51 v1(2816.93,3161.42)
MIPI_DSI_TX1_D3N: U33.194 U90074.19 | length 1776.3
  Top w3.94: v1(1854.33,3291.34) U90074.19@1854.33,3336.61 ; v1(2738.19,3133.86) 2744.09,3127.95 2775.59,3127.95 2788.69,3127.95 2814.96,3101.69 2814.96,2954.05 2908.77,2860.24 3113.84,2860.24 3133.86,2840.21 3133.86,2777.31 3119.74,2763.19 3104.33,2763.19 3100.39,2759.25 U33.194@3075.2,2759.25
  Bottom w3.94: v1(1854.33,3291.34) 1868.11,3277.56 1868.11,3202.08 1934.36,3135.83 2663.39,3135.83 2702.08,3135.83 2709.95,3127.95 2732.28,3127.95 v1(2738.19,3133.86)
MIPI_DSI_TX1_D3P: U33.196 U90074.20 | length 1748.1
  Top w3.94: U90074.20@1842.52,3223.43 1842.52,3259.84 v1(1854.33,3271.65) ; v1(2738.19,3114.17) 2744.09,3120.08 2785.43,3120.08 2807.09,3098.42 2807.09,2950.79 2905.51,2852.36 3110.57,2852.36 3125.98,2836.95 3125.98,2780.57 3116.48,2771.06 3104.33,2771.06 3100.39,2775 U33.196@3075.2,2775
  Bottom w3.94: v1(1854.33,3271.65) 1860.24,3265.75 1860.24,3198.82 1931.1,3127.95 2698.82,3127.95 2706.69,3120.08 2732.28,3120.08 v1(2738.19,3114.17)
MIPI_LCD_BL_1: J24.36 R57.1 | length 4587.6
  Top w3.94: R57.1@852.36,2675.2 852.36,2606.3 862.2,2596.46 2441.12,2596.46 2456.69,2612.03 2456.69,2667.32 v1(2470.47,2681.1) ; J24.36@3918.7,3320.08 3918.7,3357.68 v1(3919.29,3358.27) ; v1(3950.79,2761.81) 3960.63,2771.65 4101.8,2771.65 4261.81,2931.66 4261.81,3269.68 v1(4275.59,3283.46)
  Bottom w3.94: v1(2470.47,2681.1) 2456.69,2667.32 2456.69,2625.87 2509.73,2572.83 3236.34,2572.83 3376.1,2712.6 3789.37,2712.6 3824.8,2748.03 3937.01,2748.03 v1(3950.79,2761.81) ; v1(3919.29,3358.27) 3940.94,3336.61 4238.19,3336.61 4253.94,3320.87 4253.94,3305.12 v1(4275.59,3283.46)
MIPI_LCD_BL_2: J24.93 R193.1 | length 2189.4
  Top w3.94: R193.1@2009.84,2657.48 2023.62,2643.7 2366.14,2643.7 2374.02,2651.57 2374.02,2667.32 v1(2387.8,2681.1) ; v1(3425.2,2647.64) 3425.2,2765.75 3438.98,2779.53 3438.98,3150.2 3462.01,3173.23 J24.93@3462.01,3216.14
  Bottom w3.94: v1(2387.8,2681.1) 2374.02,2667.32 2374.02,2637.8 2486.22,2525.59 3263.78,2525.59 3385.83,2647.64 v1(3425.2,2647.64)
MIPI_LCD_EN_1: J24.18 R69.1 | length 4471.3
  Top w3.94: R69.1@1003.94,2773.62 982.28,2751.97 982.28,2649.61 1007.87,2624.02 1133.86,2624.02 1153.54,2604.33 2401.57,2604.33 2442.91,2645.67 v1(2442.91,2653.54) ; v1(4013.78,2726.38) 4112.2,2726.38 4141.73,2755.91 4171.26,2755.91 4179.13,2763.78 4179.13,2791.34 4312.99,2925.2 4312.99,3350.39 4289.37,3374.02 4070.28,3374.02 4060.43,3364.17 J24.18@4060.43,3320.08
  Bottom w3.94: v1(2442.91,2653.54) 2442.91,2628.51 2506.47,2564.96 3239.6,2564.96 3379.36,2704.72 3795.28,2704.72 3830.71,2740.16 4000,2740.16 v1(4013.78,2726.38)
MIPI_LCD_EN_2: J24.20 R204.1 | length 2542.3
  Top w3.94: v1(2311.02,3322.83) 2336.61,3297.24 2336.61,2944.88 2358.27,2923.23 R204.1@2358.27,2903.54 ; v1(2998.03,3253.94) 2998.03,3210.57 3078.68,3129.92 3220.47,3129.92 3277.56,3187.01 3277.56,3362.2 3289.37,3374.02 4036.81,3374.02 4044.69,3366.14 J24.20@4044.69,3320.08
  Bottom w3.94: v1(2311.02,3322.83) 2324.8,3336.61 2915.35,3336.61 v1(2998.03,3253.94)
MIPI_RESET_1: J24.83 R59.2 | length 2505.5
  Top w3.94: R59.2@1354.33,3307.09 v1(1372.05,3307.09) ; v1(2992.13,3340.55) 2964.57,3312.99 2964.57,3200.79 3059.06,3106.3 3263.78,3106.3 v1(3269.69,3100.39) ; J24.83@3540.75,3216.14 3541.34,3215.55 v1(3541.34,3185.04)
  Bottom w3.94: v1(1372.05,3307.09) 1427.17,3362.2 2970.47,3362.2 v1(2992.13,3340.55) ; v1(3269.69,3100.39) 3350.39,3181.1 3537.4,3181.1 v1(3541.34,3185.04)
MIPI_RESET_2: J24.79 R194.1 | length 2327.7
  Top w3.94: R194.1@2080.71,3153.54 2220.47,3153.54 2230.31,3143.7 2230.31,2948.82 2236.22,2942.91 2314.96,2942.91 2322.83,2950.79 2322.83,3289.37 v1(2311.02,3301.18) ; v1(2998.03,3281.5) 2984.25,3267.72 2984.25,3213.22 3075.42,3122.05 3312.99,3122.05 v1(3322.83,3131.89) ; J24.79@3572.24,3216.14 3572.83,3215.55 v1(3572.83,3185.04)
  Bottom w3.94: v1(2311.02,3301.18) 2297.24,3314.96 2297.24,3330.71 2311.02,3344.49 2935.04,3344.49 v1(2998.03,3281.5) ; v1(3322.83,3131.89) 3362.2,3171.26 3559.06,3171.26 v1(3572.83,3185.04)
N17781029: LED3.1 R175.2 R178.2 | length 140.4
  Top w19.68: LED3.1@1154.78,-94.43 1155.51,-94.43 R175.2@1155.51,3.94 R178.2@1196.85,3.94
N17781033: LED4.1 R180.2 | length 120.1
  Top w19.68: R180.2@1279.53,3.94 1279.53,-23.62 1331.95,-76.04 LED4.1@1331.95,-94.43
N17781361: LED3.2 R173.1 R174.1 R179.1 | length 280.5
  Top w3.94: LED3.2@1223.17,-94.54 1224.41,-93.31 1224.41,-57.09 1238.19,-43.31 R174.1@1238.19,3.94
  Top w7.87: R173.1@1155.51,106.3 R179.1@1196.85,106.3 1212.6,106.3 1216.54,102.36 1216.54,15.75 1228.35,3.94 R174.1@1238.19,3.94
N17782008: LED4.2 R181.1 R182.1 R183.1 | length 182.5
  Top w19.68: R181.1@1320.87,3.94 R183.1@1362.2,3.94 R182.1@1403.54,3.94 1400.34,0.73 LED4.2@1400.34,-94.54
N17782924: R172.1 R176.1 R177.1 U30.13 | length 173.5
  Top w19.68: U30.13@2093.31,2175.98 2110.24,2192.91 R177.1@2185.04,2192.91 R176.1@2185.04,2230.31 R172.1@2185.04,2267.72
N17810979: J6.A1 R20.1 | length 162.1
  Top w19.68: 5812.2,1529.53 5812.2,1506.69 R20.1@5812.99,1505.91
  Top w51.18: 5812.2,1529.53 J6.A1@5812.2,1667.72
N17813907: C19.1 R14.2 R17.1 U7.4 | length 147.6
  Top w15.75: R14.2@5370.08,1553.15 C19.1@5409.45,1553.15 R17.1@5448.82,1553.15 U7.4@5448.82,1622.05
N17813952: C9.2 L1.1 U7.6 | length 189
  Top w19.68: C9.2@5291.34,1728.35 5448.82,1728.35 U7.6@5448.82,1696.85
N17813954: C9.1 U7.1 | length 55.1
  Top w19.68: C9.1@5291.34,1696.85 U7.1@5346.46,1696.85
N17813970: C12.2 R15.2 R18.1 U7.3 | length 163.4
  Top w15.75: R15.2@5330.71,1553.15 C12.2@5291.34,1553.15 R18.1@5291.34,1622.05 U7.3@5346.46,1622.05
N17814312: J6.B9 R24.2 | length 330.1
  Top w19.68: R24.2@5614.17,1901.57 5675.49,1901.57 5677.85,1903.94 5753.15,1903.94 5792.52,1943.31 5871.26,1943.31 J6.B9@5910.63,1982.68
N17814521: J6.A6 R22.1 | length 119.5
  Top w19.68: R22.1@5614.17,1864.17 5665.75,1864.17 5666.14,1864.57 J6.A6@5733.46,1864.57
N17814522: J6.A8 R23.1 | length 121.1
  Top w19.68: R23.1@5614.17,1938.98 5675.49,1938.98 5679.82,1943.31 J6.A8@5733.46,1943.31
N17814531: J6.A5 R21.1 | length 198.7
  Top w19.68: R21.1@5614.17,1826.77 5676.6,1826.77 5678.18,1825.2 J6.A5@5812.2,1825.2
N17820323: J16.2 L15.2 R92.1 | length 338.3
  Top w3.94: R92.1@4303.15,129.92 4303.15,122.05 4305.71,119.49 4305.71,115.55 L15.2@4306.04,115.22 ; L15.2@4305.32,115.94 L15.2@4306.1,115.16
  Top w5.91: J16.2@4088.58,25.59 4088.58,59.06 4096.46,66.93 4096.46,82.68 4112.2,98.43 4276.71,98.43 4285.57,89.57 4308,89.57 4312.01,93.57 4312.01,109.25 ; L15.2@4305.32,115.94 4312.01,109.25 ; L15.2@4306.04,115.22 4312.01,109.25
N17820324: J16.3 L15.4 R93.1 | length 327.8
  Top w3.94: L15.4@4327.76,115.15 4327.76,118.11 4330.71,121.06 R93.1@4330.71,129.92
  Top w5.91: J16.3@4114.17,25.59 4114.17,59.06 4106.3,66.93 4106.3,78.6 4116.28,88.58 4272.64,88.58 4281.5,79.72 4312.08,79.72 4321.85,89.5 4321.85,109.24 L15.4@4327.76,115.15
N17821196: R98.1 R99.1 R100.1 R101.1 | length 113.9
  Top w3.94: R99.1@3994.09,228.35 R99.1@3994.09,230.01
  Top w15.75: R100.1@3994.09,153.54 R101.1@3994.09,190.94 3994.09,230.01 R98.1@3994.09,265.75
N17835631: D22.2 J17.3 L6.1 R110.2 | length 399.6
  Top w3.94: L6.1@3626.97,554.13 3626.97,568.9 R110.2@3629.92,568.9 R110.2@3631.89,568.9
  Top w5.91: J17.3@3562.99,292.52 3533.46,292.52 3528.54,297.44 3528.54,318.83 3553.22,343.5 3602.43,343.5 3619.09,360.17 3619.09,457.68 D22.2@3639.76,478.35 3619.09,499.02 3619.09,546.25 L6.1@3626.97,554.13
N17835635: D23.2 J17.2 L6.3 R112.2 | length 398
  Top w3.94: R112.2@3600.39,568.9 3605.31,568.9 L6.3@3605.31,554.13
  Top w5.91: J17.2@3484.25,292.52 3513.78,292.52 3518.7,297.44 3518.7,322.9 3549.14,353.35 3598.36,353.35 3609.25,364.24 3609.25,457.68 D23.2@3588.58,478.35 3609.25,499.02 3609.25,550.19 L6.3@3605.31,554.13
N17835643: D21.2 J17.7 L5.1 R109.2 | length 232.3
  Top w3.94: L5.1@3534.45,556.1 3534.45,567.92 R109.2@3537.4,570.87
  Top w5.91: L5.1@3534.45,556.1 3528.54,550.19 3528.54,499.02 D21.2@3549.21,478.35 3528.54,457.68 3528.54,395.87 3533.46,390.94 J17.7@3562.99,390.94
N17835661: D20.2 J17.6 L5.3 R111.2 | length 234
  Top w3.94: R111.2@3509.84,570.87 3512.79,570.87 L5.3@3512.79,556.1
  Top w5.91: J17.6@3484.25,390.94 3513.78,390.94 3518.7,395.87 3518.7,457.68 D20.2@3498.03,478.35 3518.7,499.02 3518.7,550.19 L5.3@3512.79,556.1
N17836003: R115.1 U18.3 | length 49.2
  Top w15.75: U18.3@3366.14,627.95 R115.1@3415.35,627.95
N17837061: D26.2 J18.4 L8.1 R117.2 | length 498.1
  Top w3.94: R117.2@3913.39,590.55 3915.35,588.58 3915.35,587.6 L8.1@3928.15,587.6
  Top w5.91: L8.1@3928.15,587.6 3934.06,581.69 3993.11,581.69 D26.2@4013.78,602.36 4034.45,581.69 4053.29,581.69 4068.9,566.08 4068.9,536.49 4094.56,510.83 4153.61,510.83 4167.32,497.12 4167.32,418.38 4175.66,410.04 4208.48,410.04 4213.39,414.95 J18.4@4213.39,455.12
N17837067: D27.2 J18.6 L8.3 R122.2 | length 497.6
  Top w3.94: R122.2@3913.39,562.99 3925.2,562.99 L8.3@3928.15,565.94
  Top w5.91: L8.3@3928.15,565.94 3934.06,571.85 3993.11,571.85 D27.2@4013.78,551.18 4034.45,571.85 4049.21,571.85 4059.06,562.01 4059.06,532.41 4090.48,500.98 4149.54,500.98 4157.48,493.04 4157.48,414.3 4171.58,400.2 4208.48,400.2 4213.39,395.29 J18.6@4213.39,355.12
N17837073: D25.2 J18.3 L7.1 R116.2 | length 329.9
  Top w3.94: R116.2@3913.39,503.94 3925.2,503.94 L7.1@3928.15,500.99 3931.11,498.03 L7.1@3933.07,498.03
  Top w5.91: L7.1@3933.07,498.03 3936.02,495.08 3995.08,495.08 D25.2@4013.78,513.78 4032.48,495.08 4053.15,495.08 4070.87,476.38 4070.87,420.02 4080.85,410.04 4108.46,410.04 4113.39,414.96 J18.3@4113.39,455.12
N17837093: D24.2 J18.5 L7.3 R121.2 | length 330.4
  Top w3.94: R121.2@3913.39,476.38 3916.02,479.01 3928.47,479.01 L7.3@3928.15,479.33
  Top w5.91: L7.3@3928.15,479.33 3934.06,485.24 3995.08,485.24 D24.2@4013.78,466.54 4032.48,485.24 4048.77,485.24 4061.02,472.3 4061.02,415.94 4076.77,400.2 4108.46,400.2 4113.39,395.28 J18.5@4113.39,355.12
N17839966: R118.2 R120.1 U19.4 | length 605.5
  Top w7.87: R120.1@3868.11,15.75 3789.37,15.75 3710.63,94.49 3710.63,208.66 3881.89,379.92
  Top w15.75: R118.2@3868.11,-23.62 R120.1@3868.11,15.75 ; 3881.89,379.92 U19.4@3881.89,399.61
N17839975: R119.1 U19.3 | length 45.3
  Top w15.75: U19.3@3992.13,399.61 R119.1@4037.4,399.61
N17840574: D45.1 D46.1 U37.1
N17841639: R140.2 U24.6 | length 109.9
  Top w3.94: R140.2@555.12,1606.3 578.74,1606.3 606.41,1633.97 U24.6@653.53,1633.97
N17841777: D44.1 R139.2 R142.2
N17841779: R141.2 U24.5 | length 105
  Top w3.94: R141.2@555.12,1643.7 590.44,1643.7 606.3,1659.56 U24.5@653.53,1659.56
N17841795: C124.1 U24.2 Y2.2 | length 147.1
  Top w7.87: U24.2@842.51,1608.38 868.11,1608.38 891.62,1631.89 C124.1@911.42,1631.89 933.07,1631.89 960.63,1659.45 Y2.2@968.5,1659.45
N17841829: C123.1 U24.1 Y2.1 | length 140.6
  Top w7.87: U24.1@842.51,1582.79 872.05,1582.79 881.78,1592.52 C123.1@911.42,1592.52 929.13,1592.52 952.76,1568.9 966.54,1568.9 Y2.1@968.5,1566.93
N17841853: D44.2 R143.2 U24.3 | length 217.5
  Top w15.75: U24.3@842.51,1633.97 811.72,1633.97 801.77,1624.02 D44.2@801.77,1505.91 R143.2@856.3,1505.91
N17857255: J16.4 R95.1 | length 326.7
  Top w3.94: J16.4@4139.76,25.59 4139.76,59.06 4145.67,64.96 4257.87,64.96 4267.72,55.12 4344.49,55.12 4375.98,86.61 R95.1@4375.98,124.02
N17857883: D30.2 L10.1 R124.2 U36.3 | length 463.1
  Top w3.94: L10.1@2272.63,2465.55 L10.1@2274.6,2463.58
  Top w5.91: U36.3@1897.24,2491.73 1937.41,2491.73 1942.32,2486.82 1942.32,2456.69 1961.02,2437.99 2124.09,2437.99 2157.55,2471.46 2170.28,2471.46 D30.2@2188.98,2452.76 2207.68,2471.46 2266.73,2471.46 L10.1@2272.63,2465.55 ; L10.1@2274.6,2463.58 2275.58,2462.6 R124.2@2287.4,2462.6
N17857891: D31.2 L10.3 R126.2 U36.2 | length 446.8
  Top w3.94: L10.3@2272.63,2487.21 L10.3@2274.6,2489.18
  Top w5.91: U36.2@1997.24,2491.73 1957.08,2491.73 1952.17,2486.82 1952.17,2460.77 1965.1,2447.83 2120.01,2447.83 2153.47,2481.3 2170.28,2481.3 D31.2@2188.98,2500 2207.68,2481.3 2266.73,2481.3 L10.3@2272.63,2487.21 ; L10.3@2274.6,2489.18 2275.58,2490.16 R126.2@2287.4,2490.16
N17858999: D37.2 L11.2 R128.1 USB6.2 | length 291.2
  Top w5.91: USB6.2@1771.65,307.09 1771.65,354.33 1804.13,386.81 1804.13,452.76 1792.2,464.69 D37.2@1783.46,470.47 1804.13,491.14 1804.13,542.32 L11.2@1798.23,548.22 1798.23,560.04 R128.1@1795.28,562.99
N17859001: D36.2 L11.4 R129.1 USB6.3 | length 294.6
  Top w5.91: R129.1@1822.83,562.99 1819.89,562.99 L11.4@1819.89,548.22 1813.98,542.32 1813.98,491.14 D36.2@1834.65,470.47 1825.91,464.69 1813.98,452.76 1813.98,388.78 1850.39,352.36 USB6.3@1850.39,307.09
N17859027: C106.2 D33.2 USB6.8 | length 302.7
  Top w5.91: USB6.8@1732.28,307.09 1732.28,352.36 1697.83,386.81 1697.83,407.41 1723.43,433 1723.43,452.76 1735.36,464.69 D33.2@1744.09,470.47 1735.36,476.26 1723.43,488.19 1723.43,528.54 1723.43,536.42 C106.2@1744.09,557.09
N17859034: C107.2 D32.2 USB6.9 | length 302.7
  Top w5.91: USB6.9@1653.54,307.09 1653.54,352.36 1687.99,386.81 1687.99,411.49 1713.58,437.08 1713.58,452.76 1701.65,464.69 D32.2@1692.91,470.47 1701.65,476.26 1713.58,488.19 1713.58,528.54 1713.58,536.42 C107.2@1692.91,557.09
N17860878: R127.1 U20.3 | length 47.2
  Top w19.68: U20.3@1283.47,360.24 R127.1@1283.46,407.48
N17862900: R113.2 R114.1 U18.4 | length 95.3
  Top w3.94: R113.2@3202.76,625.98 R113.2@3202.76,627.95
  Top w19.68: R114.1@3163.39,625.98 3165.35,627.95 3202.76,627.95 U18.4@3255.9,627.95
N17863952: Q9.1 R107.1 | length 39.8
  Top w15.75: R107.1@3952.76,190.94 3952.85,190.85 Q9.1@3952.85,151.2
N17864426: ED17.1 J8.4 R31.1 TP3.1 | length 707.4
  Top w3.94: ED17.1@4624.02,383.86 4635.83,383.86 4643.7,391.73 4643.7,435.04 4643.7,438.98 R31.1@4624.02,458.66
  Top w11.81: J8.4@4624.02,310.24 4689.76,310.24 4708.66,291.34 4789.37,291.34 4857.09,223.62 5016.54,223.62 5059.06,181.1 v1(5082.68,181.1)
  Top w15.75: J8.4@4624.02,310.24 ED17.1@4624.02,383.86
  Bottom w11.81: v1(5082.68,181.1) TP3.1@5106.3,181.1
N17864450: C15.1 ED18.1 J8.6 R19.1 TP5.1 | length 965
  Top w11.81: R19.1@4523.62,458.66 C15.1@4486.22,458.66 4482.28,454.72 4482.28,393.7 4492.13,383.86 ED18.1@4505.91,383.86 4505.91,214.57 4602.36,118.11 4846.39,118.11 4889.76,74.02 J8.6@4903.54,74.02 4904.33,74.8 v1(5082.68,74.8)
  Bottom w11.81: v1(5082.68,74.8) 5094.49,74.8 TP5.1@5106.3,62.99